# Altium PCB JL2.PcbDoc
Units mil, origin at the board's own origin, x right, y up, seen from the top; angles counter-clockwise.
Board outline 1670 x 695 mil, 2 copper layers (Top Layer, Bottom Layer); 58 components, 67 nets, 230 pads, 155 vias.
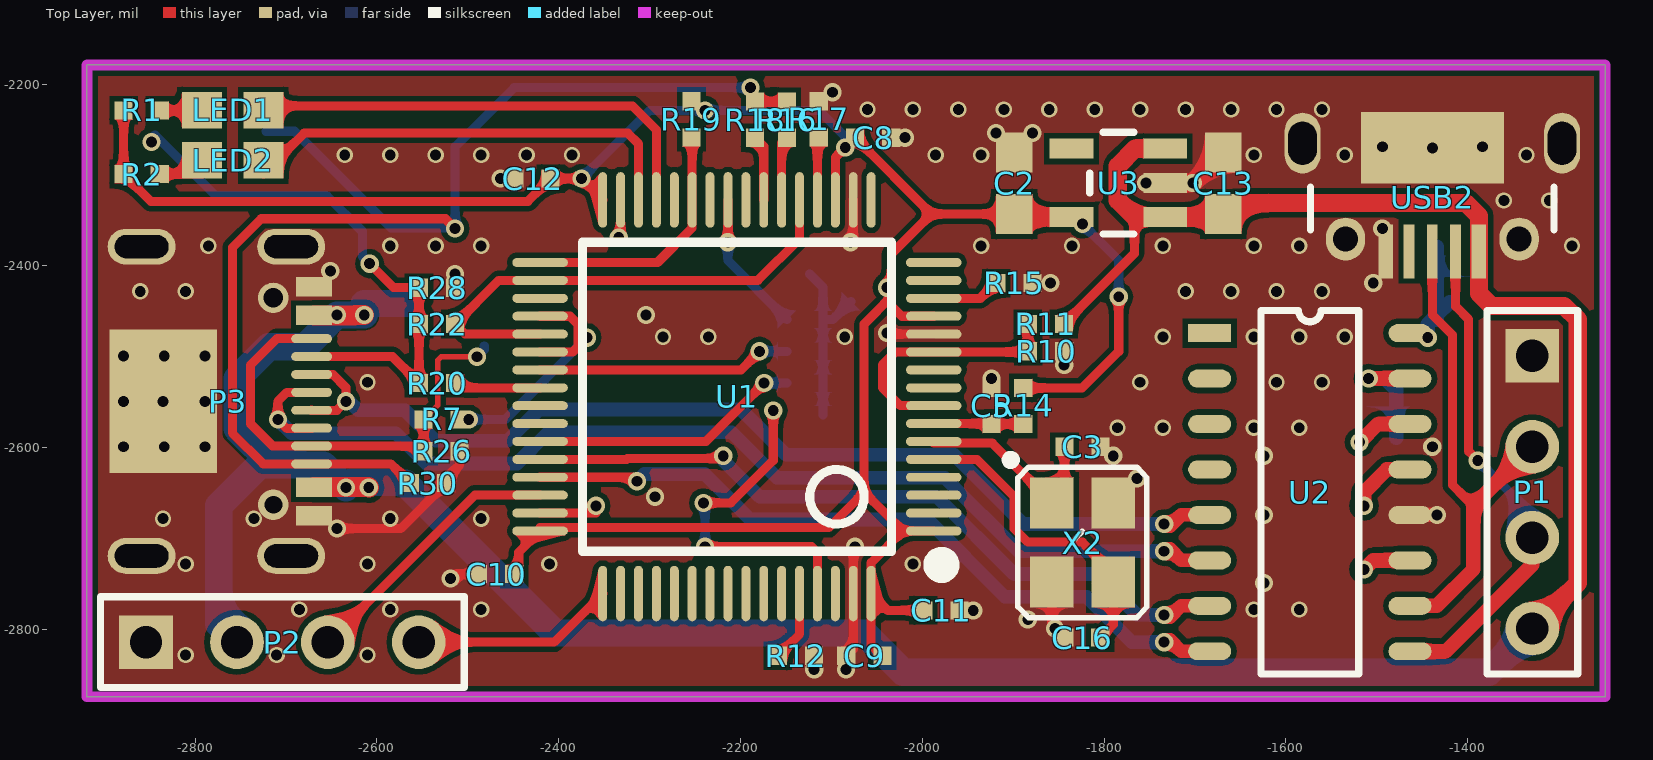
[diagram p0: Top Layer view]
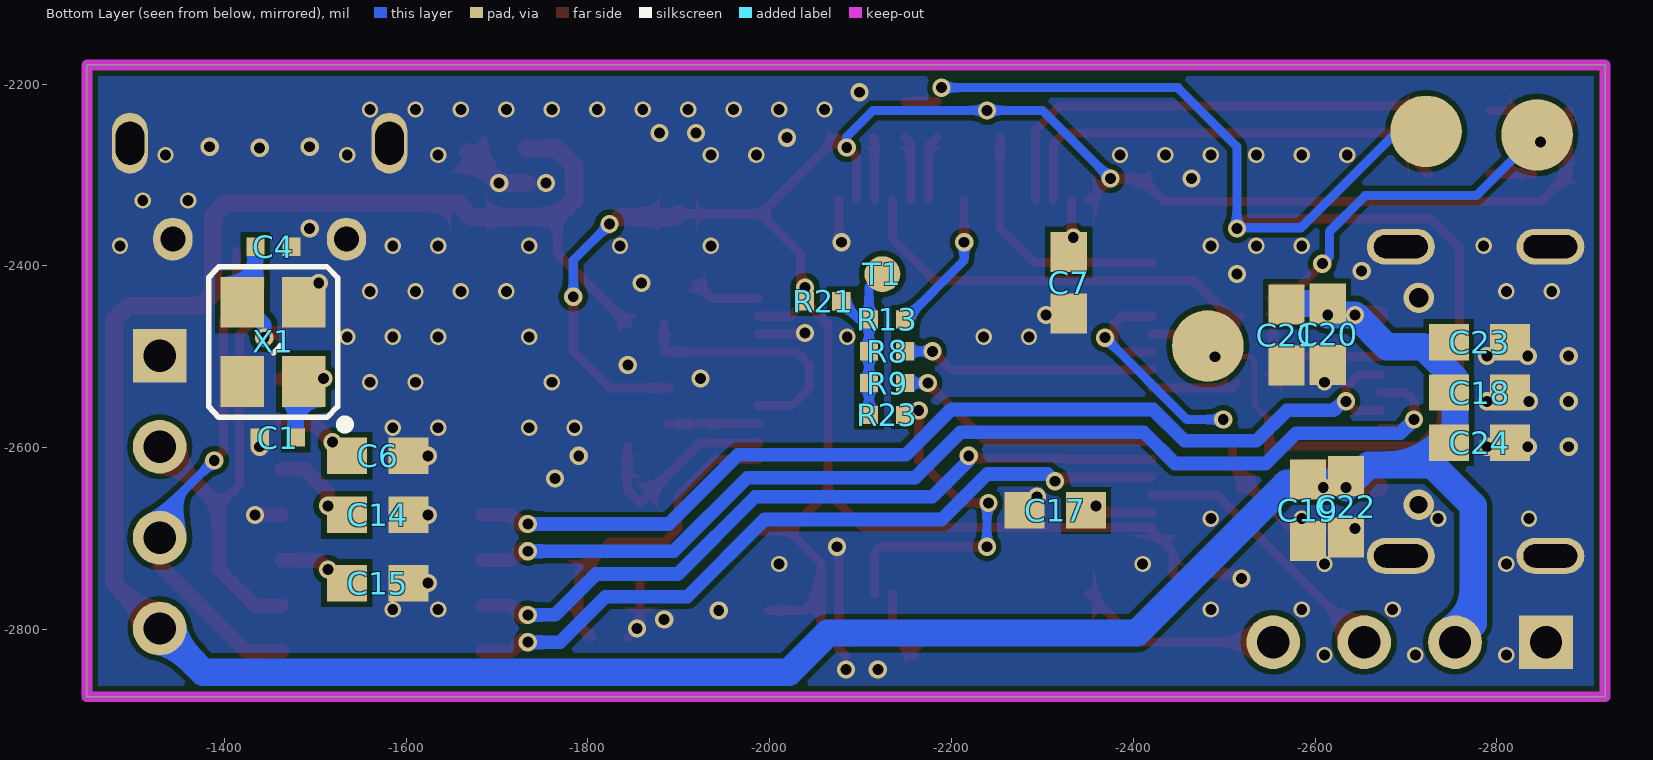
[diagram p1: Bottom Layer view, seen from below]

## Layer stack, top to bottom
Top Solder: solder mask 0.4, Solder Resist, Dk 3.5
Top Layer: signal copper 1.4
Dielectric 1: dielectric 12.6, FR-4, Dk 4.8
Bottom Layer: signal copper 1.4
Bottom Solder: solder mask 0.4, Solder Resist, Dk 3.5

## Board outline
-2919,-2874 -1249,-2874 -1249,-2179 -2919,-2179

## Design rules (kind name [scope] priority, off if disabled: settings)
Clearance [All] p1: gap=6 ignorepadtopadclearanceinfootprint=FALSE except(0: Arc-Hole Track-Hole SMDPad-Hole THPad-Hole Via-Hole Fill-Hole Poly-Hole Region-Hole Text-Hole)
DiffPairsRouting [All] p1: maxlimit=10 minlimit=10 mostfreqgap=10 toplayer_minwidth=6 toplayer_maxwidth=15 toplayer_prefwidth=10 bottomlayer_minwidth=6 bottomlayer_maxwidth=15 bottomlayer_prefwidth=10 maxuncoupledlength=500
MinimumSolderMaskSliver [All] p1 off: minsoldermaskwidth=10
PlaneConnect [All] p1: planeconnectstyle=Direct reliefexpansion=20 reliefentries=4 reliefconductorwidth=10 reliefairgap=10
PolygonConnect [All] p1: connectstyle=Direct reliefconductorwidth=10 reliefentries=4 polygonreliefangle="90 Angle" airgapwidth=10
RoomDefinition JL2 [InComponentClass('JL2')] p1 off: confinementstyle=ConfineIn formatcopy=TRUE lockcomponents=FALSE outline -895.38,-2798.06 7189.62,-2798.06 7189.62,-2158.06 -895.38,-2158.06
RoutingVias [All] p1: holewidth=11.81 width=19.68 viastyle="Through Hole" minholewidth=11.81 minwidth=19.68 maxholewidth=28 maxwidth=50
SilkToBoardRegionClearance [All] p1 off:
SilkToSilkClearance [All] p1 off: silktosilkclearance=10
SilkToSolderMaskClearance [IsPad] p1 off: minsilkscreentomaskgap=10 clearancetoexposedcopper=TRUE
SolderMaskExpansion [All] p1: expansion=4
Width [All] p1: maxlimit=30 minlimit=6 preferedwidth=10
24 further rules are at their usual default settings.

## Classes and differential pairs
differential pair TYPEC: +TYPEC_P -TYPEC_N
differential pair MCU_USB: +MCU_USB_P -MCU_USB_N

## Components (designator, comment, footprint, x,y, rotation, side; value= is the part's Value field where it differs from the comment)
C1 "18p" 0402 -1459,-2589 r0 bottom
C2 "4.7uF" 0603 -1899,-2309 r270 top
C3 "18p" 0402 -1824,-2599 r0 top
C4 "18p" 0402 -1454,-2379 r180 bottom
C5 "0.1u" 0402 -1924,-2554 r270 top
C6 "2.2u" 0603 -1569,-2609 r0 bottom
C7 "2.2u" 0603 -2329,-2419 r90 bottom
C8 "0.1u" 0402 -2054,-2259 r180 top
C9 "0.1u" 0402 -2064,-2829 r0 top
C10 "0.1u" 0402 -2469,-2739 r0 top
C11 "0.1u" 0402 -1979,-2779 r180 top
C12 "0.1u" 0402 -2429,-2304 r0 top
C13 "4.7uF" 0603 -1669,-2309 r270 top
C14 "2.2u" 0603 -1569,-2674 r0 bottom
C15 "2.2u" 0603 -1569,-2749 r0 bottom
C16 "18p" 0402 -1824,-2809 r180 top
C17 "2.2u" 0603 -2314,-2669 r180 bottom
C18 "4.7uF" 0603 -2781.2,-2539.35 r0 bottom
C19 "4.7uF" 0603 -2592.23,-2669.28 r90 bottom
C20 "4.7uF" 0603 -2614,-2475.41 r90 bottom
C21 "4.7uF" 0603 -2568.61,-2476.36 r90 bottom
C22 "4.7uF" 0603 -2634,-2665.41 r90 bottom
C23 "4.7uF" 0603 -2781.2,-2484.24 r0 bottom
C24 "4.7uF" 0603 -2781.2,-2594.47 r0 bottom
LED1 "红色" 0603 -2759,-2229 r0 top
LED2 "蓝色" 0603 -2759,-2284 r0 top
P1 "Header 4" HDR1X4 -1329,-2499 r270 top
P2 "Header 4" HDR1X4 -2854,-2814 r0 top
P3 "USBC" USBTC -2764,-2549 r270 top
R1 "220r" 0402 -2859,-2229 r0 top
R2 "220r" 0402 -2859,-2299 r0 top
R7 "220r" 0402 -2529,-2569 r0 top
R8 "220r" 0402 -2129,-2494 r180 bottom
R9 "220r" 0402 -2129,-2529 r180 bottom
R10 "10K" 0402 -1864,-2494 r0 top
R11 "20K" 0402 -1864,-2464 r180 top
R12 "10k" 0402 -2139,-2829 r180 top
R13 "220r" 0402 -2129,-2459 r180 bottom
R14 "10k" 0402 -1889,-2554 r270 top
R15 "10K" 0402 -1899,-2419 r0 top
R16 "220r" 0402 -2149,-2239 r270 top
R17 "10K" 0402 -2114,-2239 r90 top
R18 "220r" 0402 -2184,-2239 r270 top
R19 "10K" 0402 -2254,-2239 r90 top
R20 "220r" 0402 -2534,-2529 r0 top
R21 "10K" 0402 -2059,-2439 r0 bottom
R22 "220r" 0402 -2534,-2464 r0 top
R23 "10K" 0402 -2129,-2564 r180 bottom
R26 "220k" 0402 -2529,-2604 r0 top
R28 "220k" 0402 -2534,-2424 r0 top
R30 "220k" 0402 -2544,-2639 r0 top
T1 "TestPad" "TestPad - 1mm" -2124,-2409 r180 bottom
U1 "STM32F205RET6TR" "LQFP64 10X10_L" -2204,-2544 r90 top
U2 "SL2.1" SOP16 -1684,-2474 r0 top
U3 "LP5907" SOT23-5 -1784,-2309 r90 top
USB2 "USB Micro Type B" MICRO-YZX -1439,-2154 r180 top
X1 "8mhz" OSCILLATOR-3.2X2.5 -1454,-2484 r90 bottom
X2 "8mhz" OSCILLATOR-3.2X2.5 -1824,-2704 r270 top

## Footprints (in the part's own frame and the unit in brackets; to place one, negate y for a bottom-side part, rotate by r counter-clockwise, add the part's x,y. Pads: shape width x height; smd on the part's side, far side on the other; paste and mask are expansions set on the pad)
0402 [mil] "0402-RES"
  rect 20x20 smd: 1(-19.69,0) 2(20,0)
0603 [mil] "0603-RES"
  rect 44x40 smd: 1(-33.46,0) 2(34,0)
HDR1X4 [mm] "Connector; Header; 4 Position"
  rect 1.5x1.5 hole 0.9: 1(0,0)
  round 1.5 hole 0.9: 2(2.54,0) 3(5.08,0) 4(7.62,0)
  silkscreen extent -1.27,-1.27 8.89,1.27
"LQFP64 10X10_L" [mm] "64脚，体宽10x10mm，脚距0.5mm"
  oval 0.25x1.55 smd: 1(-3.75,-5.5) 2(-3.25,-5.5) 3(-2.75,-5.5) 4(-2.25,-5.5) 5(-1.75,-5.5) 6(-1.25,-5.5) 7(-0.75,-5.5) 8(-0.25,-5.5) 9(0.25,-5.5) 10(0.75,-5.5) 11(1.25,-5.5) 12(1.75,-5.5) 13(2.25,-5.5) 14(2.75,-5.5) 15(3.25,-5.5) 16(3.75,-5.5) 33(3.75,5.5) 34(3.25,5.5) 35(2.75,5.5) 36(2.25,5.5) 37(1.75,5.5) 38(1.25,5.5) 39(0.75,5.5) 40(0.25,5.5) 41(-0.25,5.5) 42(-0.75,5.5) 43(-1.25,5.5) 44(-1.75,5.5) 45(-2.25,5.5) 46(-2.75,5.5) 47(-3.25,5.5) 48(-3.75,5.5)
  oval 1.55x0.25 smd: 17(5.5,-3.75) 18(5.5,-3.25) 19(5.5,-2.75) 20(5.5,-2.25) 21(5.5,-1.75) 22(5.5,-1.25) 23(5.5,-0.75) 24(5.5,-0.25) 25(5.5,0.25) 26(5.5,0.75) 27(5.5,1.25) 28(5.5,1.75) 29(5.5,2.25) 30(5.5,2.75) 31(5.5,3.25) 32(5.5,3.75) 49(-5.499,3.75) 50(-5.499,3.25) 51(-5.499,2.75) 52(-5.499,2.25) 53(-5.499,1.75) 54(-5.499,1.25) 55(-5.499,0.75) 56(-5.499,0.25) 57(-5.499,-0.25) 58(-5.499,-0.75) 59(-5.499,-1.25) 60(-5.499,-1.75) 61(-5.499,-2.25) 62(-5.499,-2.75) 63(-5.499,-3.25) 64(-5.499,-3.75)
  silkscreen extent -4.95,-5.96 4.32,4.32, body extent -6,-6 6,6, height 1.45
MICRO-YZX [mm]
  rect 0.4x1.5 smd: 1(-1.3,5.85) 5(1.3,5.85)
  rect 0.3x1.5 smd: 2(-0.65,5.85) 3(0,5.85) 4(0.65,5.85)
  oval 1x1.7 hole 0.8 slot 1.2 at 90 deg: 5(-3.625,2.82) 5(3.625,2.82)
  oval 1.1x1.2 hole 0.7: 5(-2.425,5.5) 5(2.425,5.5)
  rect 4x2 smd: 5(0,2.95)
  silkscreen extent -3.4,4.05 3.4,5.25, body extent -4.02,0.33 3.98,5.93, height 2.6
OSCILLATOR-3.2X2.5 [mil] "OSCILLATOR-3.2X2.5"
  rect 56x48 smd: 1(-43.31,-33.46) 2(44,-33.46) 3(44,34) 4(-43.31,34)
  silkscreen extent -95,-83 83,71
SOP16 [mm]
  rect 1.2x0.5 smd: 1(0,0)
  oval 1.2x0.5 smd: 2(0,-1.27) 3(0,-2.54) 4(0,-3.81) 5(0,-5.08) 6(0,-6.35) 7(0,-7.62) 8(0,-8.89) 9(5.6,-8.89) 10(5.6,-7.62) 11(5.6,-6.35) 12(5.6,-5.08) 13(5.6,-3.81) 14(5.6,-2.54) 15(5.6,-1.27) 16(5.6,0)
  silkscreen extent 1.43,-9.53 4.17,0.64
SOT23-5 [mil] "SOT23-5"
  rect 22x48 smd: 1(-37.4,-51.19) 2(0,-51.19) 3(38,-51.19) 4(38,52) 5(-37.4,52)
  silkscreen extent -56,-17 56,32
"TestPad - 1mm" [mm]
  round 1 smd: 1(0,0)
USBTC [mm]
  oval 0.25x1.14 smd paste-0.01 mask+0.03: CC1(-1.25,2.34) CC2(1.75,2.34) DN(-0.75,2.34) DN(0.25,2.34) DP(-0.25,2.34) DP(0.75,2.34) SBU1(1.25,2.34) SBU2(-1.75,2.34)
  oval 1x1.9 hole 0.65 slot 1.5 at 90 deg paste+0 mask+0.03: GND(-4.32,1.77) GND(-4.32,-2.41) GND(4.32,1.77) GND(4.32,-2.41)
  rect 0.55x1 smd paste-0.01 mask+0.03: GND(-3.2,2.41) GND(3.2,2.41) VBUS(-2.4,2.41) VBUS(2.4,2.41)
  round 0.85 hole 0.55 paste-1 mask+0: GND(-2.89,1.27)
  rect 4x3 smd mask+0.4: GND(0,-1.81)
  round 0.85 hole 0.5 paste-1 mask+0: GND(2.89,1.27)

## Part data
C1 C3 C4 C5 C6 C7 C8 C9 C10 C11 C12 C14 C15 C16 C17: library part C, "无极性贴片电容"
C2 C13 C18 C19 C20 C21 C22 C23 C24: library part Cap, "Capacitor"
LED1 LED2: library part LED-SMD, "贴片LED"
P1 P2: "Header, 4-Pin"
R1 R2 R7 R8 R9 R10 R11 R12 R13 R14 R15 R16 R17 R18 R19 R20 R21 R22 R23 R26 R28 R30: library part R, "贴片电阻"
U1: "ARM Cortex-M3 32-bit MCU, 512 KB Flash, 128 KB Internal RAM, 51 I/Os, 64-pin LQFP, -40 to 85 degC, Tape and Reel"
USB2: library part USB_Micro_TypeB, "Connector SMD USB Micro Type B middle mount"
X1 X2: library part OSCILLATOR-3.2X2.5, "Crystal Oscillator in 3.2x2.5 SMD"

## Free pads (board coordinates)
  round 78.74 smd far side: 0(-2844.2,-2255.89) 1(-2722.15,-2251.95) 2(-2481.99,-2488.17)

## Via types
v1: diameter 20, hole 12, Top Layer to Bottom Layer, tented both sides, 84 vias
v2: diameter 18, hole 12, Top Layer to Bottom Layer, tented both sides, 71 vias

## Nets (pads, with @x,y where several pads share a name; then routed paths per layer and width w, separated by ;. In a path a pad name is that pad's centre, name@x,y a point inside that pad or via, vN(x,y) a via of type N, cw(c..) or ccw(c..) an arc to the next point about the centre after c; other vN are vias at no path point)
3V3: C2.2 C8.2 C9.2 C10.2 C11.2 C12.2 R1.1 R2.1 R14.1 R19.2 R21.2 U1.1 U1.13 U1.19 U1.32 U1.48 U1.64 U3.5 | length 2752.1
  Top Layer w10: R1.1 R2.1 -2848.68,-2329 -2434,-2329 C12.2 v1(-2375.11,-2304) U1.32 ; C10.2@-2444,-2739 -2444,-2715.11 U1.48 -2420.52,-2688 -2103,-2688 -2064,-2649 ; U1.19 -2095.73,-2280.73 v1(-2084.86,-2269.86) C8.2 -1990,-2343 ; C9.2 -2056.36,-2816.64 U1.64 ; C11.2 -2037.87,-2779 U1.64 ; U1.1 -2021.37,-2691.63 ; U1.13 -2022.59,-2455.41 -2034,-2444 -2034,-2434 ; C2.2 -1990,-2343 ; R14.1 -1824.31,-2534.31 -1784,-2494 v1(-1784,-2434) ; -2064,-2649 -2064,-2464 -2034,-2434 ; -2064,-2649 -2021.37,-2691.63 ; U1.64 -2056.36,-2726.62 -2021.37,-2691.63 ; -2034,-2434 -2034,-2387 -1990,-2343
  Top Layer w20: C2.2 -1895.6,-2346.4 U3.5
  Bottom Layer w10: v1(-2375.11,-2304) -2300.11,-2229 v1(-2239,-2229) -2114,-2229 -2084.86,-2258.14 v1(-2084.86,-2269.86) ; v1(-1824,-2354) -1784,-2394 v1(-1784,-2434)
  other v1: -2039,-2424
GND: C1.2 C2.1 C3.2 C4.2 C5.1 C6.1 C7.1 C8.1 C9.1 C10.1 C11.1 C12.1 C13.1 C14.1 C15.1 C16.2 C17.1 C18.1 C19.1 C20.1 C21.1 C22.1 C23.1 C24.1 P1.1 P2.1 P3.GND R10.2 R12.1 R15.2 R17.2 R26.2 R28.2 R30.2 U1.12 U1.18 U1.63 U2.12 U3.2 USB2.5 X1.2 X1.4 X2.2 X2.4 | length 611.8
  Top Layer w10: v1(-2644,-2689) -2574,-2689 R30.2 -2524,-2634 -2509,-2619 R26.2 ; v1(-2519,-2744) -2514,-2739 C10.1 ; C9.1 -2076.04,-2821.36 U1.63 -2076.04,-2711.04 v1(-2074,-2709) ; v1(-2079,-2374) -2076.04,-2371.04 U1.18 ; v1(-2039,-2474) -2037.91,-2475.09 U1.12 ; X2.2 -1857.46,-2795.54 v1(-1854,-2799) C16.2
  Top Layer w16: U2.12 v1(-1434,-2674)
  Top Layer w20: U3.2 v1(-1702.46,-2309) C13.1
  other v1: -2119,-2844 -2084,-2844 -1884,-2789 -1944,-2779 -1624,-2749 -1624,-2674 -2294,-2654 -1764,-2634 -1790,-2609 -1624,-2609 -2879,-2599 -2834,-2599 -2789,-2599 -1439,-2599 -2879,-2549 -2835.26,-2549 -2789,-2549 -1924,-2524 -1844,-2509 -2879,-2499 -2834,-2499 -2789,-2499 -2304,-2454 -1859,-2419 -1504,-2419 -2514,-2409 -2651.28,-2405.5 -1494,-2359 -1754,-2309 -2464,-2304 -1439,-2270.14 -1494,-2269 -1384,-2269 -2019,-2259 -1919,-2254 -1879,-2254 -2099,-2209
  other v2: -2810.38,-2828.06 -2710.38,-2828.06 -2610.38,-2828.06 -2685.38,-2778.06 -2585.38,-2778.06 -2485.38,-2778.06 -1635.38,-2778.06 -1585.38,-2778.06 -2810.38,-2728.06 -2610.38,-2728.06 -2410.38,-2728.06 -2010.38,-2728.06 -2835.38,-2678.06 -2735.38,-2678.06 -2585.38,-2678.06 -2485.38,-2678.06 -1785.38,-2578.06 -1735.38,-2578.06 -1635.38,-2578.06 -1585.38,-2578.06 -2610.38,-2528.06 -1760.38,-2528.06 -1610.38,-2528.06 -1560.38,-2528.06 -2285.38,-2478.06 -2235.38,-2478.06 -2085.38,-2478.06 -1735.38,-2478.06 -1635.38,-2478.06 -1585.38,-2478.06 -1535.38,-2478.06 -2860.38,-2428.06 -2810.38,-2428.06 -1710.38,-2428.06 -1660.38,-2428.06 -1610.38,-2428.06 -1560.38,-2428.06 -2785.38,-2378.06 -2585.38,-2378.06 -2535.38,-2378.06 -2485.38,-2378.06 -1935.38,-2378.06 -1835.38,-2378.06 -1735.38,-2378.06 -1635.38,-2378.06 -1585.38,-2378.06 -1285.38,-2378.06 -1360.38,-2328.06 -1310.38,-2328.06 -2635.38,-2278.06 -2585.38,-2278.06 -2535.38,-2278.06 -2485.38,-2278.06 -2435.38,-2278.06 -2385.38,-2278.06 -1985.38,-2278.06 -1935.38,-2278.06 -1635.38,-2278.06 -1535.38,-2278.06 -1335.38,-2278.06 -2060.38,-2228.06 -2010.38,-2228.06 -1960.38,-2228.06 -1910.38,-2228.06 -1860.38,-2228.06 -1810.38,-2228.06 -1760.38,-2228.06 -1710.38,-2228.06 -1660.38,-2228.06 -1610.38,-2228.06 -1560.38,-2228.06
MCU_USB_N: U1.44 U2.7 | length 819.8
  Top Layer w10: U1.44 -2325.24,-2612.89 -2324.36,-2612 -2222,-2612 v1(-2219,-2609)
  Top Layer w15: v1(-1734,-2784) -1731.5,-2786.5 -1727.62,-2786.5 -1715.12,-2774 U2.7
  Bottom Layer w15: v1(-2219,-2609) -2219,-2614 -2214,-2619 -2179,-2654 -1984.05,-2654 -1899.05,-2739 -1809,-2739 -1764,-2784 v1(-1734,-2784)
MCU_USB_P: U1.45 U2.8 | length 824.5
  Top Layer w10: U1.45 -2318.43,-2632.57 v1(-2314,-2637)
  Top Layer w15: v1(-1734,-2814) -1731.5,-2811.5 -1727.62,-2811.5 -1715.12,-2824 U2.8
  Bottom Layer w15: v1(-2314,-2637) -2306,-2629 -2239.36,-2629 -2189.36,-2679 -1994.41,-2679 -1909.41,-2764 -1819.36,-2764 -1769.36,-2814 v1(-1734,-2814)
NetC1_1: C1.1 U2.15 X1.1 | length 110.8
  Top Layer w16: v1(-1509,-2524) U2.15
  Bottom Layer w16: X1.1 -1478.68,-2536.09 C1.1
NetC3_1: C3.1 U1.6 X2.1 | length 226.4
  Top Layer w10: U1.6 -1987.48,-2595 -1923.16,-2595 X2.1 -1843.68,-2646.91 C3.1
NetC4_1: C4.1 U2.16 X1.3 | length 150.7
  Top Layer w16: U2.16 -1449,-2474 v1(-1444,-2479)
  Bottom Layer w16: v1(-1444,-2479) -1444,-2464 X1.3@-1434,-2454 ; C4.1 -1434,-2379.31 X1.3@-1434,-2454 ; X1.3@-1434,-2459 X1.3@-1434,-2454 ; X1.3 X1.3@-1434,-2454
NetC5_2: C5.2 R14.2 U1.7 | length 98.7
  Top Layer w10: U1.7 -1924.48,-2573.52 C5.2 R14.2
NetC6_2: C6.2 U2.14 | length 63.8
  Top Layer w16: v1(-1519,-2594) -1499,-2574 U2.14
NetC7_2: C7.2 U1.31 | length 42.4
  Top Layer w10: v1(-2334,-2369) -2331.95,-2366.95 U1.31
NetC14_2: C14.2 U2.13 | length 75.8
  Top Layer w16: v1(-1514,-2664) -1514,-2649 -1489,-2624 U2.13
NetC15_2: C15.2 U2.11 | length 54.6
  Top Layer w16: v1(-1514,-2734) -1504,-2724 U2.11
NetC16_1: C16.1 U1.5 X2.3 | length 346.7
  Top Layer w10: U1.5 -1940.11,-2612.89 -1899,-2654 -1899,-2689 -1884,-2704 -1824,-2704 -1790,-2738 X2.3 -1790,-2794.68 C16.1
NetC17_2: C17.2 U1.47 | length 69.5
  Top Layer w10: U1.47 -2359.06,-2671.94 -2359,-2672 v1(-2359,-2664)
NetLED1_1: LED1.1 R1.2 | length 46.5
  Top Layer w10: R1.2 LED1.1
NetLED2_1: LED2.1 R2.2 | length 46.5
  Top Layer w10: R2.2 LED2.1@-2792.46,-2299
NetP1_2: P1.2 U2.10 USB2.3 | length 546.3
  Top Layer w10: USB2.3 -1439,-2454 -1417,-2476 -1417,-2641 -1394,-2664
  Top Layer w16: U2.10 -1434,-2774 -1394,-2734 -1394,-2664 P1.2
NetP1_3: P1.3 U2.9 USB2.2 | length 553.5
  Top Layer w10: USB2.2 -1413.41,-2444.59 -1399,-2459 -1399,-2604 v1(-1389,-2614)
  Top Layer w16: U2.9 -1424,-2824 -1329,-2729 P1.3
  Bottom Layer w10: v1(-1389,-2614) -1329,-2674 P1.3
NetR12_2: R12.2 U1.60 | length 78.4
  Top Layer w10: R12.2 -2135.1,-2805.1 U1.60
PA0: R15.1 U1.14 | length 75.7
  Top Layer w10: U1.14 -1936.28,-2435.72 -1919.56,-2419 R15.1
PA1: U1.15
PA2: U1.16
PA3: U1.17
PA4: R17.1 U1.20 | length 69.4
  Top Layer w10: U1.20 -2115.41,-2260.1 R17.1
PA5: R22.2 U1.21 U1.34 U1.37 | length 558.5
  Top Layer w10: U1.37 -2502.91,-2475.09 R22.2 -2466.04,-2416.04 U1.34 -2181.04,-2416.04 -2135.1,-2370.1 U1.21
PA6: R16.2 U1.22 | length 70.9
  Top Layer w10: U1.22 -2154.78,-2264.78 R16.2
PA7: R18.2 U1.23 | length 72.4
  Top Layer w10: R18.2 -2174.47,-2268.53 U1.23
PA8: U1.41
PA9: U1.42
PA10: R9.2 U1.43 | length 298.1
  Top Layer w10: U1.43 -2238.2,-2593.2 v1(-2174,-2529)
  Bottom Layer w10: v1(-2174,-2529) R9.2
PA13: P2.3 U1.46 | length 300.5
  Top Layer w10: P2.3 -2492.26,-2652.26 U1.46
PA14: P2.4 U1.49 | length 224.5
  Top Layer w10: P2.4 -2405.12,-2814 U1.49
PA15: U1.50
PB0: U1.26
PB1: R19.1 U1.27 U1.33 | length 283
  Top Layer w10: U1.33 -2291.35,-2396.35 -2253.21,-2358.21 U1.27 -2253.21,-2259.48 R19.1
PB2: U1.28
PB3: U1.55
PB4: U1.56
PB5: U1.57
PB6: U1.58
PB7: U1.59
PB8: R23.2 U1.61 | length 375.1
  Top Layer w10: v1(-2240.79,-2660.79) -2210.79,-2660.79 -2164,-2614 v1(-2164,-2559) ; v1(-2239,-2709) -2121.83,-2709 -2115.41,-2715.41 U1.61
  Bottom Layer w10: v1(-2240.79,-2660.79) -2239,-2659 v1(-2239,-2709)
PB9: U1.62
PB10: LED1.2 U1.29 | length 522.5
  Top Layer w10: LED1.2 -2720,-2224 -2319,-2224 -2292.58,-2250.42 U1.29
PB11: LED2.2 U1.30 | length 498
  Top Layer w10: LED2.2@-2725,-2299 -2680,-2254 -2324,-2254 -2312.26,-2265.74 U1.30
PB14: U1.35
PB15: R7.2 U1.36 U1.38 | length 291.3
  Top Layer w10: U1.38 -2384.78,-2494.78 -2379,-2489 v1@-2379,-2479 ; U1.36 -2387.59,-2455.41 -2379,-2464 v1@-2379,-2479 ; v1(-2369,-2479) v1@-2379,-2479
  Bottom Layer w10: v1(-2499,-2569) -2459,-2569 v1(-2369,-2479)
PC0: R10.1 R11.2 U1.8 U1.11 | length 286.4
  Top Layer w10: U1.8 -2024.17,-2553.83 -2044,-2534 -2044,-2509 -2029.78,-2494.78 U1.11 -1884.46,-2494.78 R10.1 -1884,-2493.68 R11.2
PC1: U1.9
PC2: U1.10
PC4: U1.24
PC5: R13.2 U1.25 | length 158.5
  Top Layer w10: v1(-2214,-2374) -2213.84,-2373.84 U1.25
  Bottom Layer w10: v1(-2214,-2374) -2214,-2394 R13.2
PC8: R8.2 U1.39 | length 280
  Top Layer w10: U1.39 -2199.46,-2514.46 v1(-2179,-2494)
  Bottom Layer w10: v1(-2179,-2494) R8.2
PC9: R20.2 U1.40 | length 95.6
  Top Layer w10: R20.2 -2508.85,-2534.15 U1.40
PC10: U1.51
PC11: U1.52
PC12: U1.53
PC13: U1.2
PC14: U1.3
PC15: U1.4
RST: R8.1 R9.1 R13.1 R21.1 R23.1 T1.1 | length 200
  Bottom Layer w10: T1.1 -2109.31,-2423.68 R13.1 ; R23.1 R9.1 R8.1 R13.1 ; R21.1 -2098.68,-2459 R13.1
SWCLK: P3.CC1 pad.0 R20.1 R22.1 R28.1 | length 621.1
  Top Layer w10: P3.CC1 -2582.9,-2499.79 R20.1 R22.1 R28.1 -2581.6,-2424 v1(-2607.98,-2397.62)
  Bottom Layer w10: v1(-2848.13,-2263.76) -2848.13,-2259.83 pad.0 -2777.27,-2322.82 -2655.22,-2322.82 -2615.85,-2362.19 -2615.85,-2389.75 v1(-2607.98,-2397.62)
SWDIO: P3.CC2 pad.1 R16.1 R18.1 R30.1 | length 1414.1
  Top Layer w10: R30.1 -2584.79,-2617.9 P3.CC2 -2725.1,-2617.9 -2759,-2584 -2759,-2380 -2727.24,-2348.24 -2524.76,-2348.24 v1(-2514,-2359) ; R18.1 R16.1
  Bottom Layer w10: pad.1 -2690.65,-2251.95 -2584.55,-2358.06 -2514.94,-2358.06 v1(-2514,-2359) -2514,-2269 -2449,-2204 v1(-2189,-2204)
SWO: P3.SBU1 P3.SBU2 pad.2 R7.1 R26.1 | length 513.4
  Top Layer w6: R7.1 -2533.17,-2553.49 -2533.17,-2503.92 -2529.24,-2499.98 v1(-2489.87,-2499.98)
  Top Layer w10: P3.SBU2 -2710.1,-2480.1 -2739,-2509 -2739,-2574 -2714.79,-2598.21 P3.SBU1 -2554.47,-2598.21 R26.1 R7.1
  Bottom Layer w10: v1(-2489.87,-2499.98) -2481.99,-2492.11 pad.2
TYPEC_N: P3.DN U2.5 | length 1141.7
  Top Layer w10: P3.DN@-2671.87,-2558.84 -2671.72,-2559 -2644,-2559 v1(-2634,-2549) -2634,-2534 -2648.53,-2519.47 P3.DN@-2671.87,-2519.47
  Top Layer w15: v1(-1734,-2684) -1731.5,-2686.5 -1727.62,-2686.5 -1715.12,-2674 U2.5
  Bottom Layer w15: v1(-2634,-2549) -2630.38,-2549 -2620.38,-2559 -2569,-2559 -2535.5,-2592.5 -2456.34,-2592.5 -2421.84,-2558 -2199.64,-2558 -2149.64,-2608 -1965,-2608 -1954,-2619 -1889,-2684 v1(-1734,-2684)
TYPEC_P: P3.DP U2.6 | length 1222.3
  Top Layer w10: P3.DP@-2671.87,-2579 -2699,-2579 v1(-2709,-2569) -2709,-2549 -2699.16,-2539.16 P3.DP@-2671.87,-2539.16
  Top Layer w15: v1(-1734,-2714) -1731.5,-2711.5 -1727.62,-2711.5 -1715.12,-2724 U2.6
  Bottom Layer w15: v1(-2709,-2569) -2694,-2584 -2579.36,-2584 -2545.86,-2617.5 -2445.98,-2617.5 -2411.48,-2583 -2210,-2583 -2160,-2633 -1975.36,-2633 -1894.36,-2714 v1(-1734,-2714)
VBUS: C13.2 C18.2 C19.2 C20.2 C21.2 C22.2 C23.2 C24.2 P1.4 P2.2 P3.VBUS R11.1 U3.1 U3.3 USB2.1 | length 3415.9
  Top Layer w10: R11.1 -1766.6,-2386.28 -1766.6,-2346.4
  Top Layer w20: U3.3 -1766,-2271 -1785,-2290 -1785,-2328 -1766.6,-2346.4 U3.1 -1672.4,-2346.4 C13.2 -1656.91,-2330.91 -1402.09,-2330.91 -1387.82,-2345.18 USB2.1 -1387.82,-2430.18 -1374,-2444 -1294,-2444 -1279,-2459 -1279,-2749 P1.4
  Top Layer w22: P3.VBUS@-2669.12,-2643.49 -2609.51,-2643.49 v1(-2609,-2644) ; P3.VBUS@-2669.12,-2454.51 -2624.51,-2454.51 -2624,-2454 v1(-2614,-2454)
  Bottom Layer w30: P2.2 -2774,-2794 -2774,-2664 -2729,-2619 -2714,-2619 ; v1(-2614,-2454) v1(-2644,-2454) -2679,-2489 -2719,-2489 -2754,-2524 -2754,-2579 -2714,-2619 ; C20.2 -2567.66,-2441.41 C21.2@-2567.17,-2440.93 ; P1.4 -1377,-2847 -2021,-2847 -2064,-2804 -2404,-2804 -2569,-2639 -2575.16,-2639 -2576.16,-2638 -2628,-2638 v1(-2634,-2644) -2659,-2619 -2714,-2619
pads on no net: U1.54 U2.1 U2.2 U2.3 U2.4 U3.4 USB2.4

## Polygon pours and split planes (outlines as drawn)
GND on Bottom Layer "Bottom Layer-No Net" (solid, remove dead copper, pour order 4): -2919,-2884 -2919,-2159 -1229,-2159 -1229,-2884
GND on Top Layer "Bottom Layer-No Net" (solid, remove dead copper, pour order 3): -2919,-2884 -2919,-2159 -1229,-2159 -1229,-2884

## Keep-outs
Keep-Out Layer:
  the board outline again, w12